# Altium PCB LinoByte - Char.PcbDoc (part 2 of 2)
Units mm, origin at the board's own origin, x right, y up, seen from the top; angles counter-clockwise.
Board outline 23 x 220 mm, 4 copper layers (Top Layer, Mid1, Mid2, Bottom Layer), stack 0.778 mm thick; 224 components, 110 nets, 606 pads, 169 vias.
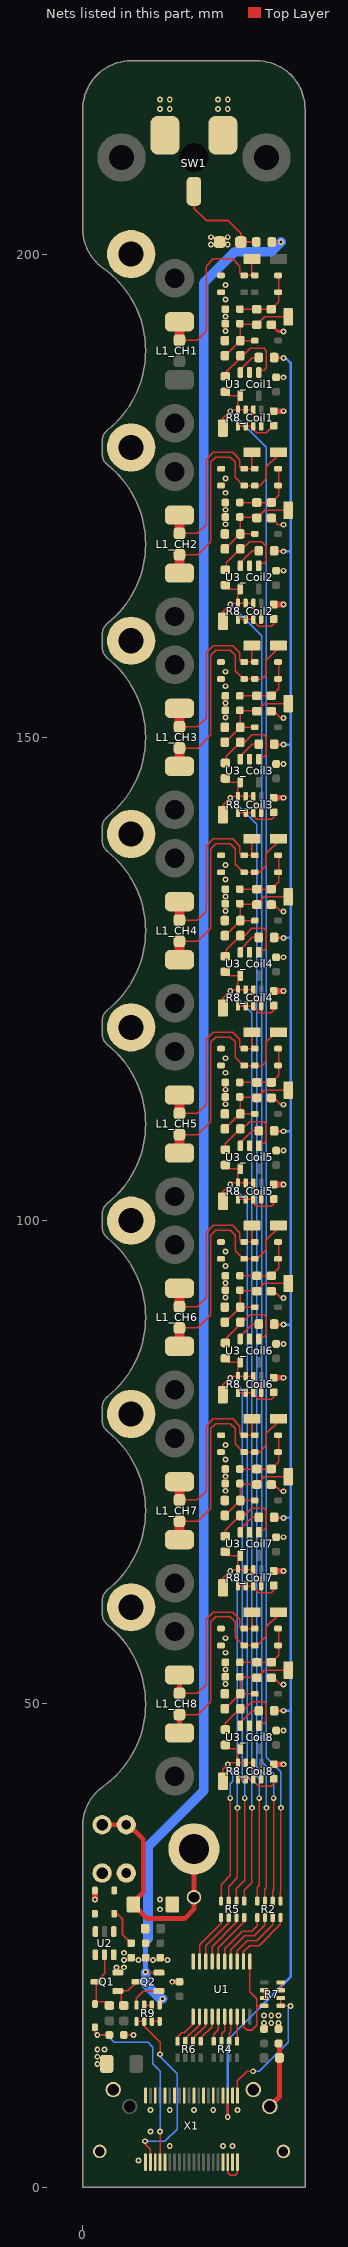
[diagram p4: the nets of this part, all layers, seen from the top]

## Via types
v1: diameter 0.6, hole 0.3, Top Layer to Bottom Layer, 169 vias

## Nets (pads, with @x,y where several pads share a name; then routed paths per layer and width w, separated by ;. In a path a pad name is that pad's centre, name@x,y a point inside that pad or via, vN(x,y) a via of type N, cw(c..) or ccw(c..) an arc to the next point about the centre after c; other vN are vias at no path point) (continued)
Coil1_BUS2: DR1_Coil2.A DR2_Coil2.K L1_CH2.2 TP2_Coil2.1 TVS2_Coil2.2 | length 25.4
  Top Layer w0.155: TVS2_Coil2.2@10,168.9 11.9,168.9 13.25,170.25 13.25,178.5 13.75,179 15.25,179 15.75,178.5 15.75,176.9 16.65,176 DR2_Coil2.K@16.7,176.05 DR1_Coil2.A@17.8,176.05 18.3,176.05 19,176.75 19,178 TP2_Coil2.1@20.25,179.25
  Top Layer w1: L1_CH2.2@10,167 TVS2_Coil2.2@10,168.9
Coil1_BUS3: DR1_Coil3.A DR2_Coil3.K L1_CH3.2 TP2_Coil3.1 TVS2_Coil3.2 | length 25.6
  Top Layer w0.155: TVS2_Coil3.2@10,148.9 11.9,148.9 13.25,150.25 13.25,158.5 13.75,159 15.25,159 15.75,158.5 15.75,156.9 16.65,156 DR2_Coil3.K@16.7,156.05 DR1_Coil3.A@17.8,156.05 17.85,156 18.5,156 19,156.5 19,158 TP2_Coil3.1@20.25,159.25
  Top Layer w1: L1_CH3.2@10,147 TVS2_Coil3.2@10,148.9
Coil1_BUS4: DR1_Coil4.A DR2_Coil4.K L1_CH4.2 TP2_Coil4.1 TVS2_Coil4.2 | length 25.4
  Top Layer w0.155: TVS2_Coil4.2@10,128.9 11.9,128.9 13.25,130.25 13.25,138.5 13.75,139 15.25,139 15.75,138.5 15.75,136.9 16.65,136 DR2_Coil4.K@16.7,136.05 DR1_Coil4.A@17.8,136.05 18.3,136.05 19,136.75 19,138 TP2_Coil4.1@20.25,139.25
  Top Layer w1: L1_CH4.2@10,127 TVS2_Coil4.2@10,128.9
Coil1_BUS5: DR1_Coil5.A DR2_Coil5.K L1_CH5.2 TP2_Coil5.1 TVS2_Coil5.2 | length 25.9
  Top Layer w0.155: TVS2_Coil5.2@10,108.9 11.9,108.9 13.25,110.25 13.25,118.5 13.75,119 15.25,119 15.75,118.5 15.75,116.9 16.65,116 DR2_Coil5.K@16.7,116.05 DR1_Coil5.A@17.8,116.05 18.55,116.05 19,116.5 19,118.5 19.75,119.25 TP2_Coil5.1@20.25,119.25
  Top Layer w1: L1_CH5.2@10,107 TVS2_Coil5.2@10,108.9
Coil1_BUS6: DR1_Coil6.A DR2_Coil6.K L1_CH6.2 TP2_Coil6.1 TVS2_Coil6.2 | length 25.3
  Top Layer w0.155: TVS2_Coil6.2@10,88.9 11.9,88.9 13.25,90.25 13.25,98.5 13.75,99 15.25,99 15.75,98.5 15.75,96.9 16.65,96 DR2_Coil6.K@16.7,96.05 DR1_Coil6.A@17.8,96.05 18.05,96.05 19,97 19,98 TP2_Coil6.1@20.25,99.25
  Top Layer w1: L1_CH6.2@10,87 TVS2_Coil6.2@10,88.9
Coil1_BUS7: DR1_Coil7.A DR2_Coil7.K L1_CH7.2 TP2_Coil7.1 TVS2_Coil7.2 | length 25.4
  Top Layer w0.155: TVS2_Coil7.2@10,68.9 11.9,68.9 13.25,70.25 13.25,78.5 13.75,79 15.25,79 15.75,78.5 15.75,76.9 16.65,76 DR2_Coil7.K@16.7,76.05 DR1_Coil7.A@17.8,76.05 18.3,76.05 19,76.75 19,78 TP2_Coil7.1@20.25,79.25
  Top Layer w1: L1_CH7.2@10,67 TVS2_Coil7.2@10,68.9
Coil1_BUS8: DR1_Coil8.A DR2_Coil8.K L1_CH8.2 TP2_Coil8.1 TVS2_Coil8.2 | length 25.3
  Top Layer w0.155: TVS2_Coil8.2@10,48.9 11.9,48.9 13.25,50.25 13.25,58.5 13.75,59 15.25,59 15.75,58.5 15.75,56.9 16.65,56 DR2_Coil8.K@16.7,56.05 DR1_Coil8.A@17.8,56.05 18.05,56.05 19,57 19,58 TP2_Coil8.1@20.25,59.25
  Top Layer w0.5: L1_CH8.2@10,47 TVS2_Coil8.2@10,48.9
Coil2_BUS1: DR3_Coil1.A DR4_Coil1.K L1_CH1.1 TP4_Coil1.1 TVS2_Coil1.1 | length 19.6
  Top Layer w0.155: TVS2_Coil1.1@10,191.1 11.85,191.1 12.75,192 12.75,198.75 13.5,199.5 15.5,199.5 16.25,198.75 16.25,198 16.45,197.8 DR4_Coil1.K@16.7,197.8 DR3_Coil1.A@17.8,197.8 17.5,198.1 TP4_Coil1.1@17.5,199.25
  Top Layer w1: TVS2_Coil1.1@10,191.1 L1_CH1.1@10,192.5 ; L1_CH1.1@10,192.75 L1_CH1.1@10,193
Coil2_BUS2: DR3_Coil2.A DR4_Coil2.K L1_CH2.1 TP4_Coil2.1 TVS2_Coil2.1 | length 19.9
  Top Layer w0.155: TVS2_Coil2.1@10,171.1 11.85,171.1 12.75,172 12.75,178.75 13.5,179.5 15.5,179.5 16.25,178.75 16.25,178 16.45,177.8 DR4_Coil2.K@16.7,177.8 DR3_Coil2.A@17.8,177.8 17.5,178.1 TP4_Coil2.1@17.5,179.25
  Top Layer w1: TVS2_Coil2.1@10,171.1 L1_CH2.1@10,173
Coil2_BUS3: DR3_Coil3.A DR4_Coil3.K L1_CH3.1 TP4_Coil3.1 TVS2_Coil3.1 | length 19.9
  Top Layer w0.155: TVS2_Coil3.1@10,151.1 11.85,151.1 12.75,152 12.75,158.75 13.5,159.5 15.5,159.5 16.25,158.75 16.25,158 16.45,157.8 DR4_Coil3.K@16.7,157.8 DR3_Coil3.A@17.8,157.8 17.5,158.1 TP4_Coil3.1@17.5,159.25
  Top Layer w1: TVS2_Coil3.1@10,151.1 L1_CH3.1@10,153
Coil2_BUS4: DR3_Coil4.A DR4_Coil4.K L1_CH4.1 TP4_Coil4.1 TVS2_Coil4.1 | length 19.9
  Top Layer w0.155: TVS2_Coil4.1@10,131.1 11.85,131.1 12.75,132 12.75,138.75 13.5,139.5 15.5,139.5 16.25,138.75 16.25,138 16.45,137.8 DR4_Coil4.K@16.7,137.8 DR3_Coil4.A@17.8,137.8 17.5,138.1 TP4_Coil4.1@17.5,139.25
  Top Layer w1: TVS2_Coil4.1@10,131.1 L1_CH4.1@10,133
Coil2_BUS5: DR3_Coil5.A DR4_Coil5.K L1_CH5.1 TP4_Coil5.1 TVS2_Coil5.1 | length 19.9
  Top Layer w0.155: TVS2_Coil5.1@10,111.1 11.85,111.1 12.75,112 12.75,118.75 13.5,119.5 15.5,119.5 16.25,118.75 16.25,118 16.45,117.8 DR4_Coil5.K@16.7,117.8 DR3_Coil5.A@17.8,117.8 17.5,118.1 TP4_Coil5.1@17.5,119.25
  Top Layer w1: TVS2_Coil5.1@10,111.1 L1_CH5.1@10,113
Coil2_BUS6: DR3_Coil6.A DR4_Coil6.K L1_CH6.1 TP4_Coil6.1 TVS2_Coil6.1 | length 19.9
  Top Layer w0.155: TVS2_Coil6.1@10,91.1 11.85,91.1 12.75,92 12.75,98.75 13.5,99.5 15.5,99.5 16.25,98.75 16.25,98 16.45,97.8 DR4_Coil6.K@16.7,97.8 DR3_Coil6.A@17.8,97.8 17.5,98.1 TP4_Coil6.1@17.5,99.25
  Top Layer w1: TVS2_Coil6.1@10,91.1 L1_CH6.1@10,93
Coil2_BUS7: DR3_Coil7.A DR4_Coil7.K L1_CH7.1 TP4_Coil7.1 TVS2_Coil7.1 | length 19.9
  Top Layer w0.155: TVS2_Coil7.1@10,71.1 11.85,71.1 12.75,72 12.75,78.75 13.5,79.5 15.5,79.5 16.25,78.75 16.25,78 16.45,77.8 DR4_Coil7.K@16.7,77.8 DR3_Coil7.A@17.8,77.8 17.5,78.1 TP4_Coil7.1@17.5,79.25
  Top Layer w1: TVS2_Coil7.1@10,71.1 L1_CH7.1@10,73
Coil2_BUS8: DR3_Coil8.A DR4_Coil8.K L1_CH8.1 TP4_Coil8.1 TVS2_Coil8.1 | length 19.9
  Top Layer w0.155: TVS2_Coil8.1@10,51.1 11.85,51.1 12.75,52 12.75,58.75 13.5,59.5 15.5,59.5 16.25,58.75 16.25,58 16.45,57.8 DR4_Coil8.K@16.7,57.8 DR3_Coil8.A@17.8,57.8 17.5,58.1 TP4_Coil8.1@17.5,59.25
  Top Layer w0.5: TVS2_Coil8.1@10,51.1 L1_CH8.1@10,53
Coil_Drive: R9.1 R9.2 X1.22 | length 19.6
  Top Layer w0.155: R9.1@5.55,17.15 R9.2@6.35,17.15 6.35,16.65 8,15 v1(8,13.75) ; v1(6.439,4.75) 6.439,4.461 7,3.9 X1.22@7,2.6
  Bottom Layer w0.155: v1(6.439,4.75) 8.5,4.75 9.75,6 9.75,11.75 8,13.5 v1(8,13.75)
Coil_Status: C11.1 D4.K X1.24 | length 20.9
  Top Layer w0.15: D4.K@1.25,16.8 1.25,16 v1(1.5,15.75) C11.1@2.75,15.75
  Top Layer w0.155: X1.24@8,2.6 v1(8,5.75)
  Bottom Layer w0.155: v1(1.5,15.75) 2.5,15.75 3.25,15 6.75,15 7.25,14.5 7.25,12.75 8,12 v1(8,5.75)
CoilDrive_V+: C9.1 C10.1 D1.K FB2.1 U2.1 | length 3.9
  Top Layer w0.2: D1.K@3.25,28.25 3.6,28.25 4.1,27.75 4.1,26.15 C10.1@5,25.25
Comparator_VRef: FB1_Coil1.1 FB1_Coil2.1 FB1_Coil3.1 FB1_Coil4.1 FB1_Coil5.1 FB1_Coil6.1 FB1_Coil7.1 FB1_Coil8.1 X1.18 | length 200.4
  Top Layer w0.254: v1(15,7.25) X1.18@15,9.475 ; FB1_Coil8.1@19.8,49.3 v1(20.75,49.3) ; FB1_Coil7.1@19.8,69.3 19.85,69.25 v1(20.75,69.25) ; FB1_Coil6.1@19.8,89.3 19.85,89.25 v1(20.75,89.25) ; FB1_Coil5.1@19.8,109.3 19.85,109.25 v1(20.75,109.25) ; FB1_Coil4.1@19.8,129.3 19.85,129.25 v1(20.75,129.25) ; FB1_Coil3.1@19.8,149.3 19.85,149.25 v1(20.75,149.25) ; FB1_Coil2.1@19.8,169.3 19.85,169.25 v1(20.75,169.25) ; FB1_Coil1.1@19.8,189.3 20.7,189.3 v1(20.75,189.25)
  Bottom Layer w0.254: v1(15,7.25) 15,15.25 21.5,21.75 21.5,49.25 ; v1(20.75,49.3) 21.45,49.3 21.5,49.25 ; v1(20.75,69.25) 21.5,69.25 ; v1(20.75,89.25) 21.5,89.25 ; v1(20.75,109.25) 21.5,109.25 ; v1(20.75,129.25) 21.5,129.25 ; v1(20.75,149.25) 21.5,149.25 ; v1(20.75,169.25) 21.5,169.25 ; v1(20.75,189.25) 21,189.25 21.5,188.75 21.5,169.25 ; 21.5,49.25 21.5,69.25 ; 21.5,69.25 21.5,89.25 ; 21.5,89.25 21.5,109.25 ; 21.5,109.25 21.5,129.25 ; 21.5,129.25 21.5,149.25 ; 21.5,149.25 21.5,169.25
E\N\A\B\L\E\: R7.5 R7.6 X1.20 | length 14.1
  Top Layer w0.155: X1.20@16,9.475 16,11 17,12 v1(17.625,12) ; R7.6@20.475,19.575 R7.5@20.475,18.775 20.5,18.75 v1(21.5,18.75)
  Bottom Layer w0.155: v1(17.625,12) 18.25,12 21.25,15 21.25,18.5 v1(21.5,18.75)
GND: C1_Coil1.2 C1_Coil2.2 C1_Coil3.2 C1_Coil4.2 C1_Coil5.2 C1_Coil6.2 C1_Coil7.2 C1_Coil8.2 C2_Coil1.2 C2_Coil2.2 C2_Coil3.2 C2_Coil4.2 C2_Coil5.2 C2_Coil6.2 C2_Coil7.2 C2_Coil8.2 C3.2 C4.2 C4_Coil1.2 C4_Coil2.2 C4_Coil3.2 C4_Coil4.2 C4_Coil5.2 C4_Coil6.2 C4_Coil7.2 C4_Coil8.2 C5.2 C7.2 C8.2 C9.2 C10.2 C11.2 D2.A D3.1 DR2_Coil1.A DR2_Coil2.A DR2_Coil3.A DR2_Coil4.A DR2_Coil5.A DR2_Coil6.A DR2_Coil7.A DR2_Coil8.A DR4_Coil1.A DR4_Coil2.A DR4_Coil3.A DR4_Coil4.A DR4_Coil5.A DR4_Coil6.A DR4_Coil7.A DR4_Coil8.A L1_Coil1.1 L1_Coil2.1 L1_Coil3.1 L1_Coil4.1 L1_Coil5.1 L1_Coil6.1 L1_Coil7.1 L1_Coil8.1 pad.@5,60 pad.@5,80 pad.@5,100 pad.@5,120 pad.@5,140 pad.@5,160 pad.@5,180 pad.@5,200 Q1.3 R3_Coil1.1 R3_Coil2.1 R3_Coil3.1 R3_Coil4.1 R3_Coil5.1 R3_Coil6.1 R3_Coil7.1 R3_Coil8.1 R4_Coil1.1 R4_Coil2.1 R4_Coil3.1 R4_Coil4.1 R4_Coil5.1 R4_Coil6.1 R4_Coil7.1 R4_Coil8.1 SW1.2 SW1.3 TVS1.2 U1.10 U2.3 U3_Coil1.2 U3_Coil2.2 U3_Coil3.2 U3_Coil4.2 U3_Coil5.2 U3_Coil6.2 U3_Coil7.2 U3_Coil8.2 X1.1 X1.3 X1.5 X1.7 X1.9 X1.11 X1.13 X1.15 X1.17 X1.19 X1.21 X1.23 X1.25 X1.37 X1.39 X1.PWR1 X1.PWR2 X1.TAB1 X1.TAB2 | length 23.1
  Top Layer w0.15: C11.2@4.25,15.75 v1(5.25,15.75)
  Top Layer w0.155: R4_Coil8.1@19.5,52.7 19.8,52.7 20.5,52 v1(20.75,52) ; R4_Coil7.1@19.5,72.7 19.8,72.7 20.5,72 v1(20.75,72) ; R4_Coil6.1@19.5,92.7 19.8,92.7 20.5,92 v1(20.75,92) ; R4_Coil5.1@19.5,112.7 19.8,112.7 20.5,112 v1(20.75,112) ; R4_Coil4.1@19.5,132.7 19.8,132.7 20.5,132 v1(20.75,132) ; R4_Coil3.1@19.5,152.7 19.8,152.7 20.5,152 v1(20.75,152) ; R4_Coil2.1@19.5,172.7 20.2,172 v1(20.75,172)
  Top Layer w0.3: R4_Coil1.1@19.5,192.7 20.2,192 v1(20.75,192)
  Top Layer w0.5: v1(9.25,21.25) C3.2@10,21.25
  Top Layer w0.6: v1(1.25,29.75) D2.A@1.25,30.75 ; L1_Coil8.1@19.75,43.75 v1(20.75,43.75) ; L1_Coil7.1@19.75,63.75 v1(20.75,63.75) ; L1_Coil6.1@19.75,83.75 v1(20.75,83.75) ; L1_Coil5.1@19.75,103.75 v1(20.75,103.75) ; L1_Coil4.1@19.75,123.75 v1(20.75,123.75) ; L1_Coil3.1@19.75,143.75 v1(20.75,143.75) ; L1_Coil2.1@19.75,163.75 v1(20.75,163.75) ; L1_Coil1.1@19.75,183.75 v1(20.75,183.75)
  other v1: 5.75,2.75 9,4.25 14.5,4.25 15.5,4.25 7,5.75 7,8 9,8 11.5,8 13.5,8 16,8 1.5,12.75 1.5,13.5 1.5,14.25 2.25,14.25 18.75,17 19.5,17 20.25,17 18.75,17.75 19.5,17.75 20.25,17.75 3.5,22.75 4.25,22.75 4.25,23.5 5.75,23.5 7.25,23.5 8.75,23.5 4.25,24.25 8,28.75 8,29.75 20.75,47.25 14.75,52.05 14.75,53.55 14.75,55.3 14.75,56.8 20.75,67.25 14.75,72.05 14.75,73.55 14.75,75.3 14.75,76.8 20.75,87.25 14.75,92.05 14.75,93.55 14.75,95.3 14.75,96.8 20.75,107.25 14.75,112.05 14.75,113.55 14.75,115.3 14.75,116.8 20.75,127.25 14.75,132.05 14.75,133.55 14.75,135.3 14.75,136.8 20.75,147.25 14.75,152.05 14.75,153.55 14.75,155.3 14.75,156.8 20.75,167.25 14.75,172.05 14.75,173.55 14.75,175.3 14.75,176.8 20.75,187.25 14.75,192.05 14.75,193.55 14.75,195.3 14.75,196.8 13.25,201 15,201 13.25,201.75 15,201.75 8,215 9,215 14,215 15,215 8,216 9,216 14,216 15,216
NetC1_Coil1_1: C1_Coil1.1 DR1_Coil1.K DR3_Coil1.K R1_Coil1.1 R4_Coil1.2 | length 7.1
  Top Layer w0.155: C1_Coil1.1@16.25,194.3 R4_Coil1.2@19.5,194.3 20.25,195.05 DR3_Coil1.K@20.25,197.8
NetC1_Coil2_1: C1_Coil2.1 DR1_Coil2.K DR3_Coil2.K R1_Coil2.1 R4_Coil2.2 | length 7.1
  Top Layer w0.155: C1_Coil2.1@16.25,174.3 R4_Coil2.2@19.5,174.3 20.25,175.05 DR3_Coil2.K@20.25,177.8
NetC1_Coil3_1: C1_Coil3.1 DR1_Coil3.K DR3_Coil3.K R1_Coil3.1 R4_Coil3.2 | length 7.1
  Top Layer w0.155: C1_Coil3.1@16.25,154.3 R4_Coil3.2@19.5,154.3 20.25,155.05 DR3_Coil3.K@20.25,157.8
NetC1_Coil4_1: C1_Coil4.1 DR1_Coil4.K DR3_Coil4.K R1_Coil4.1 R4_Coil4.2 | length 7.1
  Top Layer w0.155: C1_Coil4.1@16.25,134.3 R4_Coil4.2@19.5,134.3 20.25,135.05 DR3_Coil4.K@20.25,137.8
NetC1_Coil5_1: C1_Coil5.1 DR1_Coil5.K DR3_Coil5.K R1_Coil5.1 R4_Coil5.2 | length 7.1
  Top Layer w0.155: C1_Coil5.1@16.25,114.3 R4_Coil5.2@19.5,114.3 20.25,115.05 DR3_Coil5.K@20.25,117.8
NetC1_Coil6_1: C1_Coil6.1 DR1_Coil6.K DR3_Coil6.K R1_Coil6.1 R4_Coil6.2 | length 7.1
  Top Layer w0.155: C1_Coil6.1@16.25,94.3 R4_Coil6.2@19.5,94.3 20.25,95.05 DR3_Coil6.K@20.25,97.8
NetC1_Coil7_1: C1_Coil7.1 DR1_Coil7.K DR3_Coil7.K R1_Coil7.1 R4_Coil7.2 | length 7.1
  Top Layer w0.155: C1_Coil7.1@16.25,74.3 R4_Coil7.2@19.5,74.3 20.25,75.05 DR3_Coil7.K@20.25,77.8
NetC1_Coil8_1: C1_Coil8.1 DR1_Coil8.K DR3_Coil8.K R1_Coil8.1 R4_Coil8.2 | length 7.1
  Top Layer w0.155: C1_Coil8.1@16.25,54.3 R4_Coil8.2@19.5,54.3 20.25,55.05 DR3_Coil8.K@20.25,57.8
NetC2_Coil1_1: C2_Coil1.1 DClamp_Coil1.A R1_Coil1.2 R3_Coil1.2 Rin_Coil1.1 TP1_Coil1.1 | length 10.8
  Top Layer w0.155: Rin_Coil1.1@14.7,189.25 Rin_Coil1.1@14.75,189.25 ; Rin_Coil1.1@14.7,189.5 14.75,189.5 R3_Coil1.2@16.3,191.05 ; C2_Coil1.1@16.25,192.8 C2_Coil1.1@16.3,192.75 ; DClamp_Coil1.A@17.8,191.05 R3_Coil1.2@16.3,191.05 ; R1_Coil1.2@18,192.7 18.8,193.5 TP1_Coil1.1@21.25,193.5 ; R1_Coil1.2@18,192.75 C2_Coil1.1@16.3,192.75 ; R3_Coil1.2@16.3,191.05 C2_Coil1.1@16.3,192.75
NetC2_Coil2_1: C2_Coil2.1 DClamp_Coil2.A R1_Coil2.2 R3_Coil2.2 Rin_Coil2.1 TP1_Coil2.1 | length 10.8
  Top Layer w0.155: Rin_Coil2.1@14.7,169.5 14.75,169.5 R3_Coil2.2@16.3,171.05 ; C2_Coil2.1@16.25,172.8 C2_Coil2.1@16.3,172.75 ; DClamp_Coil2.A@17.8,171.05 R3_Coil2.2@16.3,171.05 ; R1_Coil2.2@18,172.7 18.8,173.5 TP1_Coil2.1@21.25,173.5 ; R1_Coil2.2@18,172.75 C2_Coil2.1@16.3,172.75 ; R3_Coil2.2@16.3,171.05 C2_Coil2.1@16.3,172.75
NetC2_Coil3_1: C2_Coil3.1 DClamp_Coil3.A R1_Coil3.2 R3_Coil3.2 Rin_Coil3.1 TP1_Coil3.1 | length 10.8
  Top Layer w0.155: Rin_Coil3.1@14.7,149.5 14.75,149.5 R3_Coil3.2@16.3,151.05 ; C2_Coil3.1@16.25,152.8 C2_Coil3.1@16.3,152.75 ; DClamp_Coil3.A@17.8,151.05 R3_Coil3.2@16.3,151.05 ; TP1_Coil3.1@21.25,153.5 18.75,153.5 18,152.75 C2_Coil3.1@16.3,152.75 ; R3_Coil3.2@16.3,151.05 C2_Coil3.1@16.3,152.75
NetC2_Coil4_1: C2_Coil4.1 DClamp_Coil4.A R1_Coil4.2 R3_Coil4.2 Rin_Coil4.1 TP1_Coil4.1 | length 10.8
  Top Layer w0.155: Rin_Coil4.1@14.7,129.5 14.75,129.5 R3_Coil4.2@16.3,131.05 ; C2_Coil4.1@16.25,132.8 C2_Coil4.1@16.3,132.75 ; DClamp_Coil4.A@17.8,131.05 R3_Coil4.2@16.3,131.05 ; TP1_Coil4.1@21.25,133.5 18.75,133.5 18,132.75 C2_Coil4.1@16.3,132.75 ; R3_Coil4.2@16.3,131.05 C2_Coil4.1@16.3,132.75
NetC2_Coil5_1: C2_Coil5.1 DClamp_Coil5.A R1_Coil5.2 R3_Coil5.2 Rin_Coil5.1 TP1_Coil5.1 | length 10.8
  Top Layer w0.155: Rin_Coil5.1@14.7,109.5 16.25,111.05 R3_Coil5.2@16.3,111.05 ; C2_Coil5.1@16.25,112.8 C2_Coil5.1@16.3,112.75 ; DClamp_Coil5.A@17.8,111.05 R3_Coil5.2@16.3,111.05 ; TP1_Coil5.1@21.25,113.5 18.75,113.5 18,112.75 C2_Coil5.1@16.3,112.75 ; R3_Coil5.2@16.3,111.05 C2_Coil5.1@16.3,112.75
NetC2_Coil6_1: C2_Coil6.1 DClamp_Coil6.A R1_Coil6.2 R3_Coil6.2 Rin_Coil6.1 TP1_Coil6.1 | length 10.8
  Top Layer w0.155: Rin_Coil6.1@14.7,89.5 14.75,89.5 R3_Coil6.2@16.3,91.05 ; C2_Coil6.1@16.25,92.8 C2_Coil6.1@16.3,92.75 ; DClamp_Coil6.A@17.8,91.05 R3_Coil6.2@16.3,91.05 ; TP1_Coil6.1@21.25,93.5 18.75,93.5 18,92.75 C2_Coil6.1@16.3,92.75 ; R3_Coil6.2@16.3,91.05 C2_Coil6.1@16.3,92.75
NetC2_Coil7_1: C2_Coil7.1 DClamp_Coil7.A R1_Coil7.2 R3_Coil7.2 Rin_Coil7.1 TP1_Coil7.1 | length 10.8
  Top Layer w0.155: Rin_Coil7.1@14.7,69.5 14.75,69.5 R3_Coil7.2@16.3,71.05 ; C2_Coil7.1@16.25,72.8 C2_Coil7.1@16.3,72.75 ; DClamp_Coil7.A@17.8,71.05 R3_Coil7.2@16.3,71.05 ; TP1_Coil7.1@21.25,73.5 18.75,73.5 18,72.75 C2_Coil7.1@16.3,72.75 ; R3_Coil7.2@16.3,71.05 C2_Coil7.1@16.3,72.75
NetC2_Coil8_1: C2_Coil8.1 DClamp_Coil8.A R1_Coil8.2 R3_Coil8.2 Rin_Coil8.1 TP1_Coil8.1 | length 10.8
  Top Layer w0.155: Rin_Coil8.1@14.7,49.5 14.75,49.5 R3_Coil8.2@16.3,51.05 ; C2_Coil8.1@16.25,52.8 C2_Coil8.1@16.3,52.75 ; DClamp_Coil8.A@17.8,51.05 R3_Coil8.2@16.3,51.05 ; TP1_Coil8.1@21.25,53.5 18.75,53.5 18,52.75 C2_Coil8.1@16.3,52.75 ; R3_Coil8.2@16.3,51.05 C2_Coil8.1@16.3,52.75
NetC4_1: C4.1 FB3.1 X1.PWR4 | length 7
  Top Layer w0.5: X1.PWR4@19.35,8.35 20.35,9.35 20.35,12.1 FB3.1@20.35,13.375 20.35,14.775 C4.1@20.25,14.875
NetC6_1: C6.1 Hole1.1 pad.3 pad.@11.5,30 TVS1.1 | length 25.6
  Top Layer w0.5: pad.3@2,37.5 C6.1@4.5,37.5 4.75,37.5 6.25,36 6.25,30.5 5.235,29.485 TVS1.1@5.235,29.25 6.69,27.795 10.545,27.795 11.5,28.75 pad.@11.5,30 Hole1.1@11.5,35
NetC6_2: C6.2 D1.A D2.K pad.@2,32.5 U2.4 U2.6
NetD3_2: D3.2 R12.2 SW1.1 | length 10.2
  Top Layer w0.2: SW1.1@11.5,206.5 11.5,204.75 12.75,203.5 15,203.5 16.35,202.15 D3.2@16.35,201.25 R12.2@17.95,201.25
NetFB1_Coil1_2: FB1_Coil1.2 U3_Coil1.3 | length 2.7
  Top Layer w0.155: U3_Coil1.3@16.3,187.755 16.3,188.05 17.55,189.3 FB1_Coil1.2@18.2,189.3
NetFB1_Coil2_2: FB1_Coil2.2 U3_Coil2.3 | length 2.7
  Top Layer w0.155: U3_Coil2.3@16.3,167.755 16.3,168.05 17.55,169.3 FB1_Coil2.2@18.2,169.3
NetFB1_Coil3_2: FB1_Coil3.2 U3_Coil3.3 | length 2.7
  Top Layer w0.155: U3_Coil3.3@16.3,147.755 16.3,148.05 17.55,149.3 FB1_Coil3.2@18.2,149.3
NetFB1_Coil4_2: FB1_Coil4.2 U3_Coil4.3 | length 2.7
  Top Layer w0.155: U3_Coil4.3@16.3,127.755 16.3,128.05 17.55,129.3 FB1_Coil4.2@18.2,129.3
NetFB1_Coil5_2: FB1_Coil5.2 U3_Coil5.3 | length 2.7
  Top Layer w0.155: U3_Coil5.3@16.3,107.755 16.3,108.05 17.55,109.3 FB1_Coil5.2@18.2,109.3
NetFB1_Coil6_2: FB1_Coil6.2 U3_Coil6.3 | length 2.7
  Top Layer w0.155: U3_Coil6.3@16.3,87.755 16.3,88.05 17.55,89.3 FB1_Coil6.2@18.2,89.3
NetFB1_Coil7_2: FB1_Coil7.2 U3_Coil7.3 | length 2.7
  Top Layer w0.155: U3_Coil7.3@16.3,67.755 16.3,68.05 17.55,69.3 FB1_Coil7.2@18.2,69.3
NetFB1_Coil8_2: FB1_Coil8.2 U3_Coil8.3 | length 2.7
  Top Layer w0.155: U3_Coil8.3@16.3,47.755 16.3,48.05 17.55,49.3 FB1_Coil8.2@18.2,49.3
NetL1_Coil1_2: L1_Coil1.2 R8_Coil1.5 R8_Coil1.6 R8_Coil1.7 | length 4.5
  Top Layer w0.155: R8_Coil1.5@16.05,182.2 R8_Coil1.6@16.85,182.2 R8_Coil1.7@17.65,182.2 17.65,181.85 18,181.5 19,181.5 L1_Coil1.2@19.75,182.25
NetL1_Coil2_2: L1_Coil2.2 R8_Coil2.5 R8_Coil2.6 R8_Coil2.7 | length 4.7
  Top Layer w0.155: R8_Coil2.5@16.05,162.2 R8_Coil2.6@16.85,162.2 R8_Coil2.7@17.65,162.2 17.65,162.069 18.197,161.522 19.523,161.522 19.75,161.75 L1_Coil2.2@19.75,162.25
NetL1_Coil3_2: L1_Coil3.2 R8_Coil3.5 R8_Coil3.6 R8_Coil3.7 | length 4.8
  Top Layer w0.155: R8_Coil3.5@16.05,142.2 R8_Coil3.6@16.85,142.2 R8_Coil3.7@17.65,142.2 17.65,141.85 17.978,141.522 19.522,141.522 19.75,141.75 L1_Coil3.2@19.75,142.25
NetL1_Coil4_2: L1_Coil4.2 R8_Coil4.5 R8_Coil4.6 R8_Coil4.7 | length 4.7
  Top Layer w0.155: R8_Coil4.5@16.05,122.2 R8_Coil4.6@16.85,122.2 R8_Coil4.7@17.65,122.2 17.65,122.069 18.197,121.522 19.522,121.522 19.75,121.75 L1_Coil4.2@19.75,122.25
NetL1_Coil5_2: L1_Coil5.2 R8_Coil5.5 R8_Coil5.6 R8_Coil5.7 | length 4.8
  Top Layer w0.155: R8_Coil5.5@16.05,102.2 R8_Coil5.6@16.85,102.2 R8_Coil5.7@17.65,102.2 17.65,101.85 18,101.5 19.5,101.5 19.75,101.75 L1_Coil5.2@19.75,102.25
NetL1_Coil6_2: L1_Coil6.2 R8_Coil6.5 R8_Coil6.6 R8_Coil6.7 | length 4.7
  Top Layer w0.155: R8_Coil6.5@16.05,82.2 R8_Coil6.6@16.85,82.2 R8_Coil6.7@17.65,82.2 17.65,82.069 18.197,81.522 19.523,81.522 19.75,81.75 L1_Coil6.2@19.75,82.25
NetL1_Coil7_2: L1_Coil7.2 R8_Coil7.5 R8_Coil7.6 R8_Coil7.7 | length 4.7
  Top Layer w0.155: R8_Coil7.5@16.05,62.2 R8_Coil7.6@16.85,62.2 R8_Coil7.7@17.65,62.2 17.65,62.069 18.197,61.522 19.522,61.522 19.75,61.75 L1_Coil7.2@19.75,62.25
NetL1_Coil8_2: L1_Coil8.2 R8_Coil8.5 R8_Coil8.6 R8_Coil8.7 | length 4.7
  Top Layer w0.155: R8_Coil8.5@16.05,42.2 R8_Coil8.6@16.85,42.2 R8_Coil8.7@17.65,42.2 17.65,42.069 18.219,41.5 19.5,41.5 19.75,41.75 L1_Coil8.2@19.75,42.25
NetQ1_1: Q1.1 Q2.2 R11.1 | length 4.1
  Top Layer w0.155: Q1.1@3.625,20.3 Q1.1@4.2,20.3 ; R11.1@4.25,18.8 4,19.05 4,20.1 Q1.1@4.2,20.3 ; Q2.2@5.625,21.25 4.675,20.3 Q1.1@4.2,20.3
NetQ2_1: Q2.1 R9.8 | length 3.3
  Top Layer w0.155: R9.8@5.55,18.85 5.55,19.55 6.25,20.25 7.754,20.25 ccw(c7.754,20.421) Q2.1@7.875,20.3
NetQ2_3: Q2.3 R9.5 R12.1 | length 193.7
  Top Layer w0.155: v1(6.5,22.25) 7,22.25 7.05,22.2 Q2.3@7.875,22.2 ; R9.5@7.95,18.85 7.95,19.2 v1(8.25,19.5) ; R12.1@19.55,201.25 v1(20.5,201.25)
  Bottom Layer w0.5: v1(6.5,22.25) 6.5,25.438 6.75,25.688
  Bottom Layer w1: v1(6.5,22.25) 6.5,21 8,19.5 v1(8.25,19.5) ; 6.75,25.688 6.75,35.25 12.5,41 12.5,197 15.75,200.25 19.5,200.25 v1(20.5,201.25)
NetR2_5: R2.5 U1.5 | length 6.5
  Top Layer w0.155: U1.5@14.675,23.35 14.675,24.675 16.5,26.5 17.5,26.5 18.05,27.05 R2.5@18.05,27.9
NetR2_6: R2.6 U1.4 | length 6.6
  Top Layer w0.155: U1.4@15.325,23.35 15.325,24.575 16.75,26 17.75,26 18.85,27.1 R2.6@18.85,27.9
NetR2_7: R2.7 U1.3 | length 6.7
  Top Layer w0.155: U1.3@15.975,23.35 15.975,24.475 17,25.5 18,25.5 19.65,27.15 R2.7@19.65,27.9
NetR2_8: R2.8 U1.2 | length 6.7
  Top Layer w0.155: U1.2@16.625,23.35 16.625,24.375 17.25,25 18.25,25 20.45,27.2 R2.8@20.45,27.9
NetR4_1: R4.1 U1.18 | length 2.6
  Top Layer w0.155: R4.1@15.95,15.1 15.975,15.125 U1.18@15.975,17.65
NetR4_2: R4.2 U1.17 | length 2.6
  Top Layer w0.155: R4.2@15.15,15.1 15.15,15.9 15.325,16.075 U1.17@15.325,17.65
NetR4_3: R4.3 U1.16 | length 2.7
  Top Layer w0.155: R4.3@14.35,15.1 14.35,15.85 14.675,16.175 U1.16@14.675,17.65
NetR4_4: R4.4 U1.15 | length 2.7
  Top Layer w0.155: R4.4@13.55,15.1 13.55,15.8 14.025,16.275 U1.15@14.025,17.65
NetR5_5: R5.5 U1.9 | length 5.5
  Top Layer w0.155: U1.9@12.075,23.35 12.075,25.075 14.3,27.3 R5.5@14.3,27.9
NetR5_6: R5.6 U1.8 | length 5.5
  Top Layer w0.155: U1.8@12.725,23.35 12.725,24.975 15.1,27.35 R5.6@15.1,27.9
NetR5_7: R5.7 U1.7 | length 5.6
  Top Layer w0.155: U1.7@13.375,23.35 13.375,24.875 15.9,27.4 R5.7@15.9,27.9
NetR5_8: R5.8 U1.6 | length 5.7
  Top Layer w0.155: U1.6@14.025,23.35 14.025,24.775 16.7,27.45 R5.8@16.7,27.9
NetR6_1: R6.1 U1.14 | length 3
  Top Layer w0.155: R6.1@12.2,15.1 12.2,15.45 13.375,16.625 U1.14@13.375,17.65
NetR6_2: R6.2 U1.13 | length 3.1
  Top Layer w0.155: R6.2@11.4,15.1 11.4,15.4 12.725,16.725 U1.13@12.725,17.65
NetR6_3: R6.3 U1.12 | length 3.2
  Top Layer w0.155: R6.3@10.6,15.1 10.6,15.35 12.075,16.825 U1.12@12.075,17.65
NetR6_4: R6.4 U1.11 | length 3.4
  Top Layer w0.155: R6.4@9.8,15.1 9.8,15.55 10.25,16 10.5,16 11.425,16.925 U1.11@11.425,17.65
NetR7_2: R7.2 R7.3 | length 0.8
  Top Layer w0.155: R7.3@18.775,19.575 R7.2@18.775,20.375
NetR7_4: R7.4 U1.1 U1.19 | length 10.4
  Top Layer w0.2: U1.19@16.625,17.65 16.625,16.625 17,16.25 17.5,16.25 18,16.75 18,18.75 ; U1.1@17.275,23.35 17.275,20.225 18,19.5 18,18.75 ; R7.4@18.775,18.775 18.025,18.775 18,18.75
NetR7_7: R7.7 R7.8 | length 0.8
  Top Layer w0.155: R7.7@20.475,20.375 R7.8@20.475,21.175
NetR9_3: R9.3 R9.4 | length 0.8
  Top Layer w0.155: R9.3@7.15,17.15 R9.4@7.95,17.15
NetR9_6: R9.6 R9.7 | length 0.8
  Top Layer w0.155: R9.7@6.35,18.85 R9.6@7.15,18.85
NetRfb_Coil1_1: Rfb_Coil1.1 Rin_Coil1.2 U3_Coil1.1 | length 8.5
  Top Layer w0.155: Rfb_Coil1.1@14.75,187.35 14.75,187.7 16.3,189.25 17.3,190.25 18.75,190.25 19,190 19,188.25 18.75,188 18.5,188 18.445,188 U3_Coil1.1@18.2,187.755
NetRfb_Coil2_1: Rfb_Coil2.1 Rin_Coil2.2 U3_Coil2.1 | length 8.6
  Top Layer w0.155: Rfb_Coil2.1@14.75,167.35 14.85,167.35 14.85,168.05 Rin_Coil2.2@16.3,169.5 16.5,169.5 17.25,170.25 18.5,170.25 19,169.75 19,168.25 18.75,168 18.5,168 18.445,168 U3_Coil2.1@18.2,167.755
NetRfb_Coil3_1: Rfb_Coil3.1 Rin_Coil3.2 U3_Coil3.1 | length 8.4
  Top Layer w0.155: Rfb_Coil3.1@14.75,147.35 14.85,147.35 14.85,148.05 Rin_Coil3.2@16.3,149.5 16.75,149.5 17.5,150.25 18.75,150.25 19,150 19,148.25 18.75,148 18.445,148 18.413,147.968 U3_Coil3.1@18.416,147.966
NetRfb_Coil4_1: Rfb_Coil4.1 Rin_Coil4.2 U3_Coil4.1 | length 8.7
  Top Layer w0.155: Rfb_Coil4.1@14.75,127.35 14.85,127.35 14.85,128.05 Rin_Coil4.2@16.3,129.5 16.75,129.5 17.5,130.25 18.75,130.25 19,130 19,128.25 18.75,128 18.5,128 18.445,128 U3_Coil4.1@18.2,127.755
NetRfb_Coil5_1: Rfb_Coil5.1 Rin_Coil5.2 U3_Coil5.1 | length 8.7
  Top Layer w0.155: Rfb_Coil5.1@14.75,107.35 14.75,107.95 Rin_Coil5.2@16.3,109.5 16.5,109.5 17.25,110.25 18.75,110.25 19,110 19,108.25 18.75,108 18.5,108 18.445,108 U3_Coil5.1@18.2,107.755
NetRfb_Coil6_1: Rfb_Coil6.1 Rin_Coil6.2 U3_Coil6.1 | length 8.7
  Top Layer w0.155: Rfb_Coil6.1@14.75,87.35 14.75,87.75 16.3,89.3 Rin_Coil6.2@16.3,89.5 16.5,89.5 17.25,90.25 18.75,90.25 19,90 19,88.25 18.75,88 18.445,88 U3_Coil6.1@18.2,87.755
NetRfb_Coil7_1: Rfb_Coil7.1 Rin_Coil7.2 U3_Coil7.1 | length 8.7
  Top Layer w0.155: Rfb_Coil7.1@14.75,67.35 14.75,67.95 Rin_Coil7.2@16.3,69.5 16.75,69.5 17.5,70.25 18.75,70.25 19,70 19,68.25 18.75,68 18.445,68 U3_Coil7.1@18.2,67.755
NetRfb_Coil8_1: Rfb_Coil8.1 Rin_Coil8.2 U3_Coil8.1 | length 8.7
  Top Layer w0.155: Rfb_Coil8.1@14.75,47.35 14.75,48 16.25,49.5 Rin_Coil8.2@16.3,49.5 16.75,49.5 17.5,50.25 18.75,50.25 19,50 19,48.25 18.75,48 18.5,48 18.445,48 U3_Coil8.1@18.2,47.755
Output_BUS1: R2.1 R8_Coil1.2 R8_Coil1.3 R8_Coil1.4 R8_Coil1.8 Rfb_Coil1.2 TP3_Coil1.1 U3_Coil1.4 | length 166.3
  Top Layer w0.155: TP3_Coil1.1@14.5,182 14.5,183 v1(15.25,183.75) 15.4,183.9 R8_Coil1.4@16.05,183.9 ; Rfb_Coil1.2@14.75,185.75 15.15,185.35 16.3,185.35 16.3,185.05 16.05,184.8 R8_Coil1.4@16.05,183.9 ; R8_Coil1.8@18.45,182.2 18.45,182.8 18.25,183 18,183 17.65,183.35 R8_Coil1.2@17.65,183.9 R8_Coil1.3@16.85,183.9 R8_Coil1.4@16.05,183.9 ; R2.1@20.45,29.6 20.45,30.45 20.5,30.5 v1(20.5,39.25)
  Bottom Layer w0.155: v1(15.25,183.75) 19,180 19,44.5 20.5,43 v1(20.5,39.25)
Output_BUS2: R2.2 R8_Coil2.2 R8_Coil2.3 R8_Coil2.4 R8_Coil2.8 Rfb_Coil2.2 TP3_Coil2.1 U3_Coil2.4 | length 145.9
  Top Layer w0.155: TP3_Coil2.1@14.5,162 14.5,163 v1(15.25,163.75) 15.4,163.9 R8_Coil2.4@16.05,163.9 ; Rfb_Coil2.2@14.75,165.75 15.15,165.35 16.3,165.35 16.3,165.05 16.05,164.8 R8_Coil2.4@16.05,163.9 ; R8_Coil2.8@18.45,162.2 18.45,162.55 17.65,163.35 R8_Coil2.2@17.65,163.9 R8_Coil2.3@16.85,163.9 R8_Coil2.4@16.05,163.9 ; R2.2@19.65,29.6 19.65,30.65 19.75,30.75 v1(19.75,40.25)
  Bottom Layer w0.155: v1(15.25,163.75) 18.5,160.5 18.5,44 19.75,42.75 v1(19.75,40.25)
Output_BUS3: R2.3 R8_Coil3.2 R8_Coil3.3 R8_Coil3.4 R8_Coil3.8 Rfb_Coil3.2 TP3_Coil3.1 U3_Coil3.4 | length 125.6
  Top Layer w0.155: TP3_Coil3.1@14.5,142 14.5,143 v1(15.25,143.75) 15.4,143.9 R8_Coil3.4@16.05,143.9 ; Rfb_Coil3.2@14.75,145.75 15.15,145.35 16.3,145.35 16.3,145.05 16.05,144.8 R8_Coil3.4@16.05,143.9 ; R8_Coil3.8@18.45,142.2 18.45,142.55 17.65,143.35 R8_Coil3.2@17.65,143.9 R8_Coil3.3@16.85,143.9 R8_Coil3.4@16.05,143.9 ; R2.3@18.85,29.6 18.85,30.85 19,31 v1(19,39.25)
  Bottom Layer w0.155: v1(15.25,143.75) 18,141 18,43.5 19,42.5 v1(19,39.25)
Output_BUS4: R2.4 R8_Coil4.2 R8_Coil4.3 R8_Coil4.4 R8_Coil4.8 Rfb_Coil4.2 TP3_Coil4.1 U3_Coil4.4 | length 105.3
  Top Layer w0.155: TP3_Coil4.1@14.5,122 14.5,123 v1(15.25,123.75) 15.4,123.9 R8_Coil4.4@16.05,123.9 ; Rfb_Coil4.2@14.75,125.75 15.15,125.35 16.3,125.35 16.3,125.05 16.05,124.8 R8_Coil4.4@16.05,123.9 ; R2.4@18.05,29.6 18.05,31.05 18.25,31.25 v1(18.25,40.25) ; R8_Coil4.8@18.45,122.2 18.45,122.55 17.65,123.35 R8_Coil4.2@17.65,123.9 R8_Coil4.3@16.85,123.9 R8_Coil4.4@16.05,123.9
  Bottom Layer w0.155: v1(15.25,123.75) 17.5,121.5 17.5,43 18.25,42.25 v1(18.25,40.25)
Output_BUS5: R5.1 R8_Coil5.2 R8_Coil5.3 R8_Coil5.4 R8_Coil5.8 Rfb_Coil5.2 TP3_Coil5.1 U3_Coil5.4 | length 85.2
  Top Layer w0.155: TP3_Coil5.1@14.5,102 14.5,103 v1(15.25,103.75) 15.4,103.9 R8_Coil5.4@16.05,103.9 ; Rfb_Coil5.2@14.75,105.75 15.15,105.35 16.3,105.35 16.3,105.05 16.05,104.8 R8_Coil5.4@16.05,103.9 ; R5.1@16.7,29.6 16.7,30.7 17.5,31.5 v1(17.5,39.25) ; R8_Coil5.8@18.45,102.2 18.45,102.55 17.65,103.35 R8_Coil5.2@17.65,103.9 R8_Coil5.3@16.85,103.9 R8_Coil5.4@16.05,103.9
  Bottom Layer w0.155: v1(15.25,103.75) 17,102 17,42.5 17.5,42 v1(17.5,39.25)
Output_BUS6: R5.2 R8_Coil6.2 R8_Coil6.3 R8_Coil6.4 R8_Coil6.8 Rfb_Coil6.2 TP3_Coil6.1 U3_Coil6.4 | length 64.9
  Top Layer w0.155: TP3_Coil6.1@14.5,82 14.5,83 v1(15.25,83.75) 15.4,83.9 R8_Coil6.4@16.05,83.9 ; Rfb_Coil6.2@14.75,85.75 15.15,85.35 16.3,85.35 16.3,85.05 16.05,84.8 R8_Coil6.4@16.05,83.9 ; R5.2@15.9,29.6 15.9,30.9 16.75,31.75 v1(16.75,40.25) ; R8_Coil6.8@18.45,82.2 18.45,82.55 17.65,83.35 R8_Coil6.2@17.65,83.9 R8_Coil6.3@16.85,83.9 R8_Coil6.4@16.05,83.9
  Bottom Layer w0.155: v1(15.25,83.75) 16.5,82.5 16.5,42 16.75,41.75 v1(16.75,40.25)
Output_BUS7: R5.3 R8_Coil7.2 R8_Coil7.3 R8_Coil7.4 R8_Coil7.8 Rfb_Coil7.2 TP3_Coil7.1 U3_Coil7.4 | length 44.7
  Top Layer w0.155: TP3_Coil7.1@14.5,62 14.5,63 v1(15.25,63.75) 15.4,63.9 R8_Coil7.4@16.05,63.9 ; Rfb_Coil7.2@14.75,65.75 15.15,65.35 16.3,65.35 16.3,65.05 16.05,64.8 R8_Coil7.4@16.05,63.9 ; R5.3@15.1,29.6 15.1,31.1 16,32 v1(16,39.25) ; R8_Coil7.8@18.45,62.2 18.45,62.55 17.65,63.35 R8_Coil7.2@17.65,63.9 R8_Coil7.3@16.85,63.9 R8_Coil7.4@16.05,63.9
  Bottom Layer w0.155: v1(15.25,63.75) 16,63 16,42 v1(16,39.25)
Output_BUS8: R5.4 R8_Coil8.2 R8_Coil8.3 R8_Coil8.4 R8_Coil8.8 Rfb_Coil8.2 TP3_Coil8.1 U3_Coil8.4 | length 24.8
  Top Layer w0.155: R5.4@14.3,29.6 14.3,31.3 15.25,32.25 v1(15.25,40.25) ; TP3_Coil8.1@14.5,42 14.5,43.25 v1(15,43.75) 15.15,43.9 R8_Coil8.4@16.05,43.9 ; Rfb_Coil8.2@14.75,45.75 15.15,45.35 16.3,45.35 16.3,45.05 16.05,44.8 R8_Coil8.4@16.05,43.9 ; R8_Coil8.8@18.45,42.2 18.45,42.55 17.65,43.35 R8_Coil8.2@17.65,43.9 R8_Coil8.3@16.85,43.9 R8_Coil8.4@16.05,43.9
  Bottom Layer w0.155: v1(15,43.75) 15.5,43.25 15.5,42 15.25,41.75 v1(15.25,40.25)
Power_Enable: X1.38 X1.40 | length 3.4
  Top Layer w0.155: X1.38@15,2.6 15,1.5 15.25,1.25 15.75,1.25 16,1.5 X1.40@16,2.6
ZXGD_IN: D4.A Q1.2 R10.1 U2.2 | length 6.9
  Top Layer w0.155: U2.2@2.25,24.05 2.25,22.125 Q1.2@1.375,21.25 1.375,19.325 1.25,19.2 2.35,19.2 R10.1@2.75,18.8
pads on no net: L1_CH1.M2 L1_CH2.M2 L1_CH3.M2 L1_CH4.M2 L1_CH5.M2 L1_CH6.M2 L1_CH7.M2 L1_CH8.M2 SW1. SW1.M2 U2.5 X1.26 X1.27 X1.28 X1.29 X1.30 X1.31 X1.32 X1.33 X1.34 X1.35 X1.36

## Polygon pours and split planes (outlines as drawn)
+12V on Top Layer (solid, pour order 114): 2.25,16.75 4.75,16.75 4.75,17.75 2.25,17.75
GND on Top Layer "Top Layer-GND" (solid, pour order 72): 21.25,46.3 17,46.3 17,48.3 17.5,48.3 17.5,47.3 17.75,47.05 18.5,47.05 18.75,47.3 18.75,48 21.25,48
GND on Top Layer "Top Layer-GND 1" (solid, pour order 71): 21.25,66.3 17,66.3 17,68.3 17.5,68.3 17.5,67.3 17.75,67.05 18.5,67.05 18.75,67.3 18.75,68 21.25,68
GND on Top Layer "Top Layer-GND 2" (solid, pour order 69): 21.25,86.3 17,86.3 17,88.3 17.5,88.3 17.5,87.3 17.75,87.05 18.5,87.05 18.75,87.3 18.75,88 21.25,88
GND on Top Layer "Top Layer-GND 3" (solid, pour order 68): 21.25,106.3 17,106.3 17,108.3 17.5,108.3 17.5,107.3 17.75,107.05 18.5,107.05 18.75,107.3 18.75,108 21.25,108
GND on Top Layer "Top Layer-GND 4" (solid, pour order 67): 21.25,126.3 17,126.3 17,128.3 17.5,128.3 17.5,127.3 17.75,127.05 18.5,127.05 18.75,127.3 18.75,128 21.25,128
GND on Top Layer "Top Layer-GND 5" (solid, pour order 66): 21.25,146.3 17,146.3 17,148.3 17.5,148.3 17.5,147.3 17.75,147.05 18.5,147.05 18.75,147.3 18.75,148 21.25,148
GND on Top Layer "Top Layer-GND 6" (solid, pour order 65): 21.25,166.3 17,166.3 17,168.3 17.5,168.3 17.5,167.3 17.75,167.05 18.5,167.05 18.75,167.3 18.75,168 21.25,168
GND on Top Layer "Top Layer-GND 8" (solid, pour order 64): 21.25,186.3 17,186.3 17,188.3 17.5,188.3 17.5,187.3 17.75,187.05 18.5,187.05 18.75,187.3 18.75,188 21.25,188
+3V3 on Top Layer "Top Layer-+3V3 7" (solid, pour order 63): 21.25,46.3 17.25,46.3 17.25,44.55 21.25,44.55
+3V3 on Top Layer "Top Layer-+3V3 7" (solid, pour order 62): 21.25,66.3 17.25,66.3 17.25,64.55 21.25,64.55
+3V3 on Top Layer "Top Layer-+3V3 7" (solid, pour order 61): 21.25,86.3 17.25,86.3 17.25,84.55 21.25,84.55
+3V3 on Top Layer "Top Layer-+3V3 7" (solid, pour order 60): 21.25,106.3 17.25,106.3 17.25,104.55 21.25,104.55
+3V3 on Top Layer "Top Layer-+3V3 7" (solid, pour order 59): 21.25,126.3 17.25,126.3 17.25,124.55 21.25,124.55
+3V3 on Top Layer "Top Layer-+3V3 7" (solid, pour order 58): 21.25,146.3 17.25,146.3 17.25,144.55 21.25,144.55
+3V3 on Top Layer "Top Layer-+3V3 7" (solid, pour order 57): 21.25,166.3 17.25,166.3 17.25,164.55 21.25,164.55
+3V3 on Top Layer "Top Layer-+3V3 7" (solid, pour order 56): 21.25,186.3 17.25,186.3 17.25,184.55 21.25,184.55
GND on Top Layer "Top Layer-GND 15" (solid, pour order 47): 6.25,10 16.5,10 16.5,2 5,2 5,5.25 6.25,6.5
+12V on Top Layer "Top Layer-+12V 1" (solid, pour order 92): 4.25,14.75 7,14.75 7,11.75 5.75,10.5 5.75,7.75 5.5,7.5 4.5,7.5 4.25,7.75
GND on Top Layer "Top Layer-GND 10" (solid, pour order 110): 12.75,202.25 12.75,200.5 15.5,200.5 15.5,202.25
+3V3 on Top Layer "Top Layer-+3V3" (solid, pour order 108): 9.75,20 16.5,20 17.5,19 17.5,18.75 10.5,18.75 9.75,19.5
GND on Top Layer "Top Layer-GND 13" (solid, pour order 106): 9.75,21.5 10.5,22.25 10.5,23.5 11.25,24.25 11.75,24.25 11.75,21.5 11.25,21 9.75,21
GND on Top Layer "Top Layer-GND 7" (solid, pour order 54): 15.25,78.25 15.25,70.3 13.75,70.3 13.75,78.25
GND on Top Layer "Top Layer-GND 7" (solid, pour order 51): 15.25,138.25 15.25,130.3 13.75,130.3 13.75,138.25
GND on Top Layer "Top Layer-GND 7" (solid, pour order 52): 15.25,118.25 15.25,110.3 13.75,110.3 13.75,118.25
GND on Top Layer "Top Layer-GND 7" (solid, pour order 49): 15.25,178.25 15.25,170.3 13.75,170.3 13.75,178.25
GND on Top Layer "Top Layer-GND 7" (solid, pour order 50): 15.25,158.25 15.25,150.3 13.75,150.3 13.75,158.25
GND on Top Layer "Top Layer-GND 7" (solid, pour order 55): 15.25,58.25 15.25,50.3 13.75,50.3 13.75,58.25
GND on Top Layer "Top Layer-GND 7" (solid, pour order 53): 15.25,98.25 15.25,90.3 13.75,90.3 13.75,98.25
GND on Top Layer "Top Layer-GND 14" (solid, remove dead copper, pour order 102): 7,217 16,217 16,213 7,213
+3V3 on Top Layer "Top Layer-+3V3 1" (solid, pour order 98): 17,15.5 19,15.5 19.25,15.25 19.25,13 19,12.75 17,12.75 16.75,13 16.75,15.25
GND on Top Layer "Top Layer-GND 16" (solid, pour order 96): 1,14.75 3.75,14.75 3.75,11.25 4,11 4,9.75 3.5,9.25 2,9.25 1,10.25
GND on Top Layer "Top Layer-GND 9" (solid, pour order 90): 18.25,15.75 20.75,15.75 20.75,18.25 18.25,18.25
+12V on Top Layer "Top Layer-+12V" (solid, pour order 88): 7.5,24.5 7.5,27.25 10,27.25 10,24.5
GND on Top Layer "Top Layer-GND 11" (solid, pour order 84): 10,30.25 7.5,30.25 7.5,28.25 10,28.25
CoilDrive_V+ on Top Layer "Top Layer-CoilDrive_V+" (solid, pour order 82): 1.5,23.5 1.1,23.5 1,23.6 1,25 1.6,25.6 4.35,25.6 6,27.25 7,27.25 7,24.5 5,24.5 4.5,25 2,25 1.6,24.6 1.6,23.6
GND on Top Layer "Top Layer-GND 12" (solid, pour order 80): 2.9,24.5 3.1,24.7 4.278,24.7 4.778,24.25 10,24.25 10,23 8.25,23 5.5,23 4.25,21.75 3.25,21.75 2.9,22.1 2.9,23.5
NetC6_2 on Top Layer "Top Layer-NetC6_2" (solid, pour order 78): 1.025,26 1.575,26 1.575,26.9 1.9,27.225 2.572,27.225 2.925,26.911 2.925,26 3.475,26 3.475,29.225 4.75,30.5 5.75,30.5 5.75,33.5 1.025,33.5
GND on Top Layer "Top Layer-GND 7" (solid, pour order 48): 15.25,198.25 15.25,190.3 13.75,190.3 13.75,198.25
+12V on Mid2 "Mid2-+12V" (solid, pour order 70): 0,39 0,12.5 7.5,12.5 7.5,22 10,22 10,39
+3V3 on Mid2 "Mid2-+3V3" (solid, remove dead copper, pour order 76): 0,220 23,220 23,0 0,0 0,11.5 8.5,11.5 8.5,21 11,21 11,40 0,40
GND on Mid1 "Mid1-GND" (solid, pour order 74): 0,220 0,0 23,0 23,220
no net on Bottom Layer (solid, pour order 112): 20.5,38.5 20.5,20.5 15.5,20.5 15.5,38.5

## Silkscreen, mask and mechanical layers (free items; w line width, h text height)
Top Overlay:
  region: 8.25,218.75 14.75,218.75 11.5,215.5
  text "2018" at 20.75,34.75 h3 r90
  text "LINOBYTE" at 16.75,30.5 h3 r90
  text "WESLEY LEE / MAY" at 20.75,30.5 h3 r90
Bottom Overlay:
  region: 8.25,218.75 14.75,218.75 11.5,215.5
Top Solder:
  region: 6.3,3.5 6.3,1.7 16.2,1.7 16.2,3.5
  region: 6.3,10.3 6.3,8.6 16.2,8.6 16.2,10.3
Bottom Solder:
  text "WES.AM" at 20,38.25 h7 r90
Board Outline:
  the board outline again, w0.05
PCBWAY Serial#:
  lines w0.05: 3,3.75 3,7 19.5,7 19.5,3.75 3,3.75
  text "PCBWAY SERIAL#" at 3.25,4.25 h3